# Altium PCB PCB1.PcbDoc
Units mm, origin at the board's own origin, x right, y up, seen from the top; angles counter-clockwise.
Board outline 27.8 x 26 mm, 2 copper layers (Top Layer, Bottom Layer), stack 0.88 mm thick; 34 components, 28 nets, 151 pads, 27 vias.
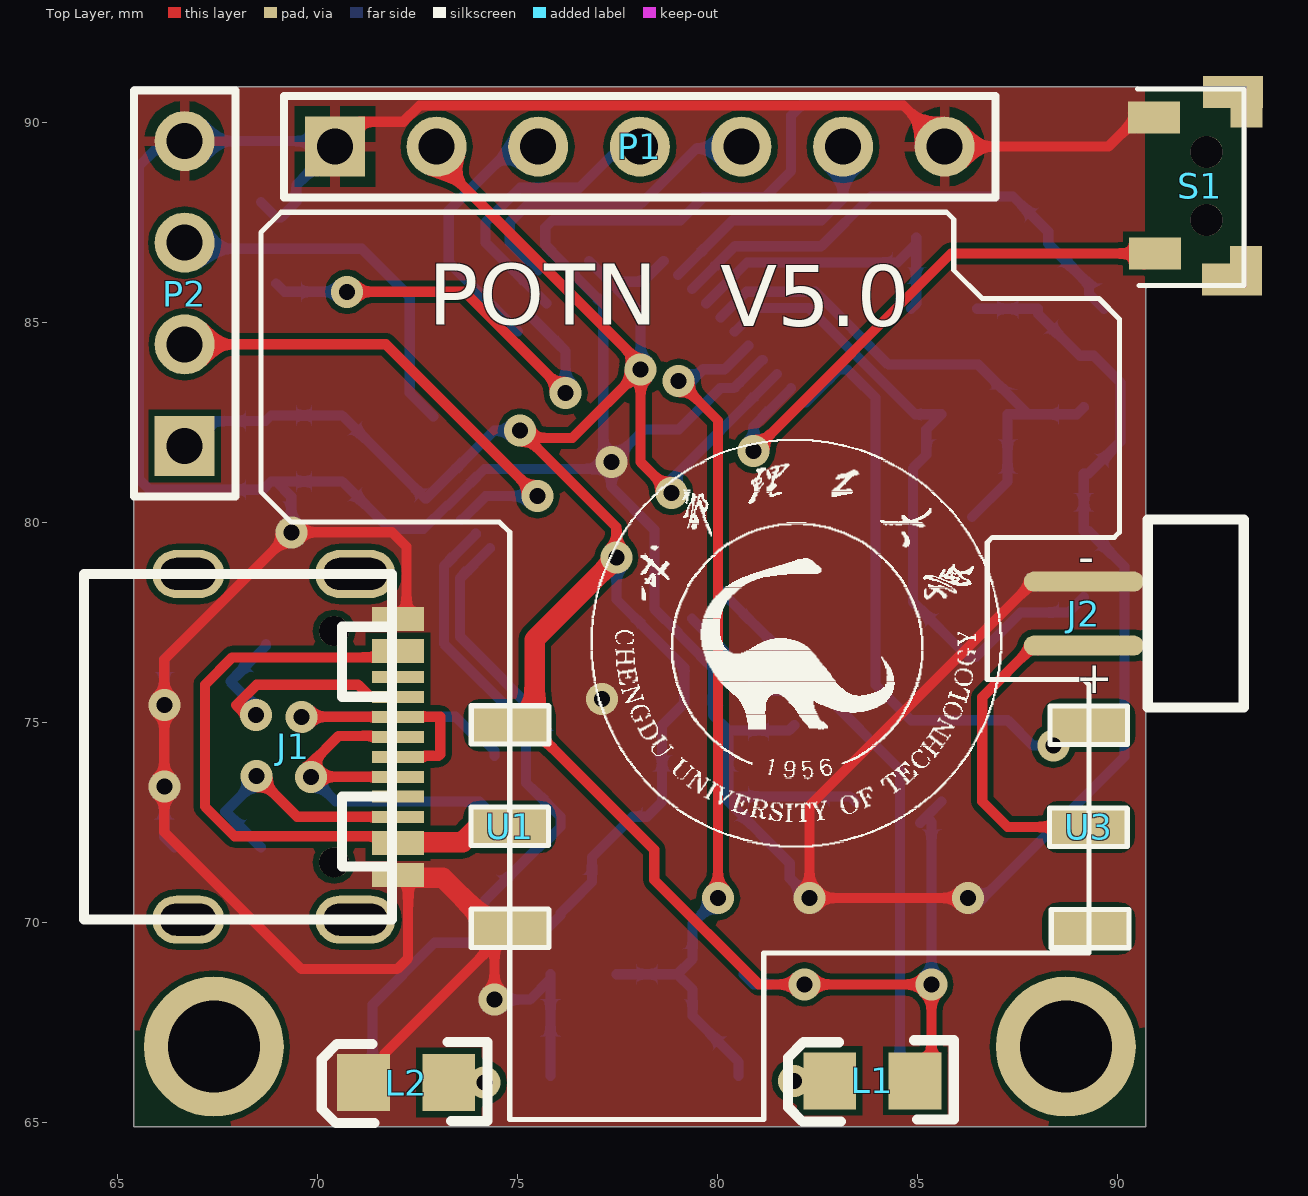
[diagram p0: Top Layer view]
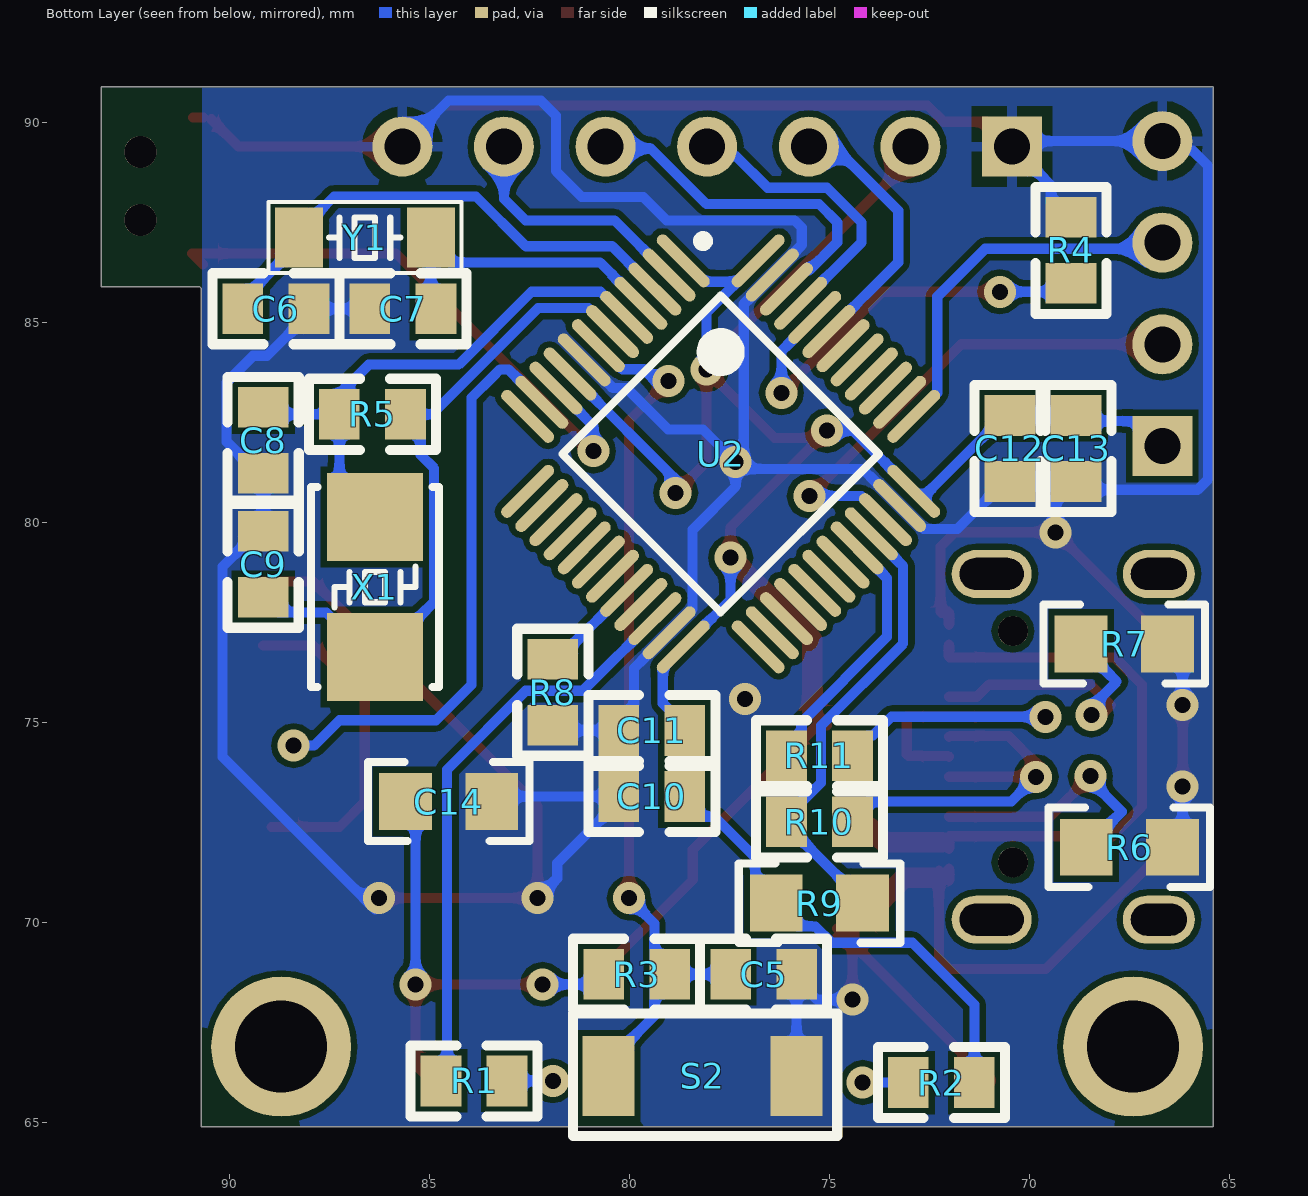
[diagram p1: Bottom Layer view, seen from below]
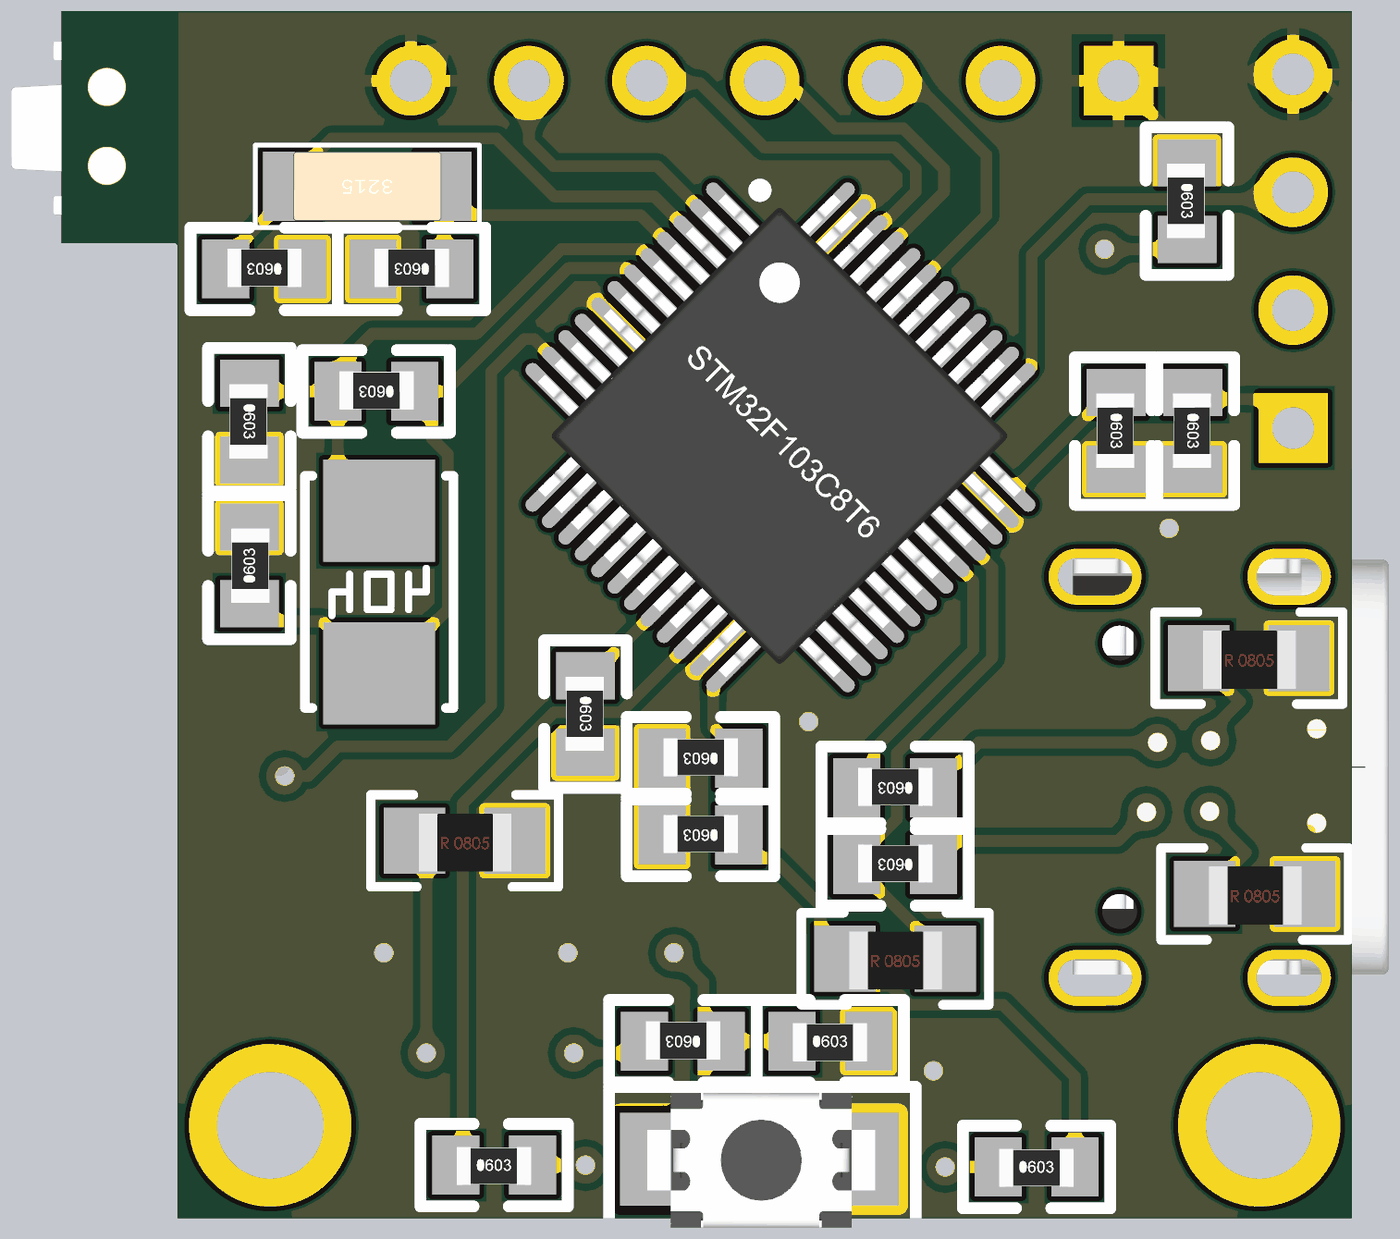
[diagram p2: 3D render of the assembled board from below, using the file's embedded part models]

## Layer stack, top to bottom
Top Solder: solder mask 0.0102, Solder Resist, Dk 3.5
Top Layer: signal copper 0.09
Dielectric 1: dielectric 0.7, FR-4, Dk 4.8
Bottom Layer: signal copper 0.09
Bottom Solder: solder mask 0.0102, Solder Resist, Dk 3.5

## Board outline
65.405,64.897 65.405,90.897 93.205,90.897 93.205,85.897 90.748,85.897 90.705,85.854 90.705,64.897

## Design rules (kind name [scope] priority, off if disabled: settings)
Clearance [All] p1: gap=0.152 ignorepadtopadclearanceinfootprint=TRUE
PolygonConnect [All] p1: thpad.connectstyle=Relief thpad.reliefconductorwidth=0.254 thpad.reliefentries=4 thpad.polygonreliefangle="90 Angle" thpad.airgapwidth=0.254 smdpad.connectstyle=Direct smdpad.reliefconductorwidth=0.254 smdpad.reliefentries=4 smdpad.polygonreliefangle="90 Angle" smdpad.airgapwidth=0.254 via.connectstyle=Direct via.reliefconductorwidth=0.254 via.reliefentries=4 via.polygonreliefangle="90 Angle" via.airgapwidth=0.254
RoutingVias [All] p1: holewidth=0.711 width=1.27 viastyle="Through Hole" minholewidth=0.3 minwidth=0.6 maxholewidth=0.711 maxwidth=1.27
SolderMaskExpansion [All] p1: expansion=0.102
Width [All] p1: maxlimit=0.254 minlimit=0.254 preferedwidth=0.254
30 further rules are at their usual default settings.

## Components (designator, comment, footprint, x,y, rotation, side; value= is the part's Value field where it differs from the comment)
C5 "104" RC0603 77.47,68.707 r180 bottom
C6 "15P" RC0603 88.011,85.344 r0 bottom
C7 "15P" RC0603 84.836,85.344 r0 bottom
C8 "22P" RC0603 89.154,82.88 r270 bottom
C9 "22P" RC0603 89.154,78.133 r90 bottom
C10 "104" RC0603 78.613,73.152 r0 bottom
C11 "104" RC0603 78.613,74.803 r0 bottom
C12 "104" RC0603 70.485,82.677 r270 bottom
C13 "104" RC0603 68.834,82.677 r270 bottom
C14 "106" RC0805 85.598,73.025 r180 bottom
J1 "TYPE-C-31-M-12" USB-TYPE-C_16PIN-MALE-TYPE-C-31-M-12 69.386,74.394 r270 top
J2 "MIC" MIC4.5*2.2MMTIE 89.154,77.724 r0 top
L1 "1" LED0805 84.938,66.04 r0 top
L2 "1" LED0805 73.279,66 r0 top
P1 "Header 7" HDR1X7 70.435,89.397 r0 top
P2 "Header 4" HDR1X4 66.675,81.915 r90 top
R1 "510" RC0603 84.709,66.04 r180 bottom
R2 "510" RC0603 73.025,66 r180 bottom
R3 "10K" RC0603 78.994,68.707 r0 bottom
R4 "10K" RC0603 68.961,87.63 r270 bottom
R5 "1M" RC0603 85.598,82.705 r0 bottom
R6 "5.1K" RC0805 68.58,71.882 r180 bottom
R7 "5.1K" RC0805 68.707,76.962 r180 bottom
R8 "10K" RC0603 81.915,76.581 r270 bottom
R9 "1.5K" RC0805 76.327,70.485 r180 bottom
R10 "22R" RC0603 74.422,72.517 r0 bottom
R11 "22R" RC0603 74.422,74.168 r0 bottom
S1 "switch_wo" SW-SMD-4X2X2侧 92.23,88.37 r270 top
S2 "SW-PB" SMT-KEY 80.52,66.167 r270 bottom
U1 "BOARD1" BOARD1DAN 74.813,71.36 r0 top
U2 "STM32F103C8T6" LQFP48 78.654,86.542 r315 bottom
U3 "BOARD2" BOARD2-DAN 78.031,71.31 r0 top
X1 "8M" "OSC 5032-2P" 86.36,78.387 r270 bottom
Y1 "32.768K" "OSC 3215-2P" 86.614,87.122 r0 bottom

## Footprints (in the part's own frame and the unit in brackets; to place one, negate y for a bottom-side part, rotate by r counter-clockwise, add the part's x,y. Pads: shape width x height; smd on the part's side, far side on the other; paste and mask are expansions set on the pad)
BOARD1DAN [mm]
  rrect50% 2x1 smd: 1(-0.01,3.57) 2(-0.01,1.03) 3(-0.01,-1.51)
BOARD2-DAN [mm]
  rrect50% 2x1 smd: 4(11.25,-1.46) 5(11.25,1.08) 6(11.25,3.62)
HDR1X4 [mm] "Connector; Header; 4 Position"
  rect 1.5x1.5 hole 0.9: 1(0,0)
  round 1.5 hole 0.9: 2(2.54,0) 3(5.08,0) 4(7.62,0)
  silkscreen extent -1.27,-1.27 8.89,1.27
HDR1X7 [mm] "Connector; Header; 7 Position"
  rect 1.5x1.5 hole 0.9: 1(0,0)
  round 1.5 hole 0.9: 2(2.54,0) 3(5.08,0) 4(7.62,0) 5(10.16,0) 6(12.7,0) 7(15.24,0)
  silkscreen extent -1.27,-1.27 16.51,1.27
LED0805 [mil]
  rect 52x56 smd: 1(0,0) 2(-84,0)
  Top Layer lines w20: -86,2 -84,0
  silkscreen extent -125,-40 38,40, body extent -81,-25 -1,24, height 43
LQFP48 [mm]
  oval 0.3x1.75 smd: 1(0,0) 2(0.5,0) 3(1,0) 4(1.5,0) 5(2,0) 6(2.5,0) 7(3,0) 8(3.5,0) 9(4,0) 10(4.5,0) 11(5,0) 12(5.5,0) 25(5.5,8.15) 26(5,8.15) 27(4.5,8.15) 28(4,8.15) 29(3.5,8.15) 30(3,8.15) 31(2.5,8.15) 32(2,8.15) 33(1.5,8.15) 34(1,8.15) 35(0.5,8.15) 36(0,8.15)
  oval 1.75x0.3 smd: 13(6.825,1.325) 14(6.825,1.825) 15(6.825,2.325) 16(6.825,2.825) 17(6.825,3.325) 18(6.825,3.825) 19(6.825,4.325) 20(6.825,4.825) 21(6.825,5.325) 22(6.825,5.825) 23(6.825,6.325) 24(6.825,6.825) 37(-1.325,6.825) 38(-1.325,6.325) 39(-1.325,5.825) 40(-1.325,5.325) 41(-1.325,4.825) 42(-1.325,4.325) 43(-1.325,3.825) 44(-1.325,3.325) 45(-1.325,2.825) 46(-1.325,2.325) 47(-1.325,1.825) 48(-1.325,1.325)
  silkscreen extent -0.82,-0.12 5.55,6.88, body extent -1.76,-0.46 7.24,8.54, height 6.78
MIC4.5*2.2MMTIE [mm]
  oval 3x0.5 smd: 1(0,-0.8) 2(0,0.8)
  silkscreen extent 1.6,-2.35 4,2.35, body extent 1.53,-2.42 3.93,2.38, height 3.3
"OSC 3215-2P" [mm] "3.2*1.5*0.6mm(长宽高)"
  rect 1.2x1.5 smd: 1(1.65,0) 2(-1.65,0)
  silkscreen extent -2.41,-0.89 2.41,0.89, body extent -1.6,-0.75 1.6,0.75, height 0.61
"OSC 5032-2P" [mm] "5mm*3.2mm*0.8mm(长*宽*高)"
  rect 2.2x2.4 smd: 1(-1.75,0) 2(1.75,0)
  silkscreen extent -2.5,-1.6 2.5,1.6, body extent -2.5,-1.6 2.5,1.6, height 1.56
RC0603 [mil]
  rect 40x50 smd: 1(0,0) 2(65,0)
  silkscreen extent -30,-35 95,35, body extent 1,-17 64,15, height 18
RC0805 [mil]
  rect 52x56 smd: 1(0,0) 2(85,0)
  silkscreen extent -37,-39 122,39, body extent 4,-26 82,23, height 16
SMT-KEY [mm]
  rect 2x1.3 smd paste+0 mask+0.2: 1(0,0) 2(0,4.7)
  silkscreen extent -1.56,-0.89 1.5,5.72, body extent -1.43,-0.06 1.47,4.84, height 2
SW-SMD-4X2X2侧 [mm] "TS-018/TS-A002 /THAM04"
  rect 0.8x1.3 smd mask+0: 1(1.646,-1.301) 2(-1.758,-1.327)
  rect 0.8x0.8 smd mask+0: 3(1.862,0.985) 4(-1.91,0.997)
  rect 0.8x1.5 smd mask+0: 3(2.293,0.629) 4(-2.393,0.654)
  round 0.8 hole 0.8 mask+0: 7(-0.893,-0.006) 8(0.807,-0.006)
  silkscreen extent -2.47,-1.73 2.44,0.93, body extent -2.38,-1.75 2.37,2.05, height 1.8
USB-TYPE-C_16PIN-MALE-TYPE-C-31-M-12 [mm]
  oval 1.2x2 hole 0.8 slot 1.6 at 90 deg: 0(-4.32,1.556) 0(4.32,1.556)
  oval 1.2x1.8 hole 0.8 slot 1.4 at 90 deg: 0(-4.32,-2.624) 0(4.32,-2.624)
  rect 0.3x1.3 smd: A1(-3.35,2.623) A4(-2.55,2.623) A5(-1.25,2.623) A6(-0.25,2.623) A7(0.25,2.623) A8(1.25,2.624) A9(2.55,2.623) A12(3.35,2.623) B1(3.05,2.623) B4(2.25,2.623) B5(1.75,2.623) B6(0.75,2.623) B7(-0.75,2.623) B8(-1.75,2.624) B9(-2.25,2.623) B12(-3.05,2.623)
  round 0.75 hole 0.75 unplated: ""(-2.89,1.026) ""(2.89,1.026)
  silkscreen extent -4.32,-5.23 4.32,2.47, body extent -4.69,-4.77 4.25,2.13, height 3.28

## Part data
C5 C6 C7 C8 C9 C10 C11 C12 C13 C14: library part Cap, "Capacitor", LatestRevisionDate=17-Jul-2002, LatestRevisionNote="Re-released for DXP Platform.", PackageDescription="Radial Cap, Thru-Hole; 2 Leads; 0.3 in Pin Spacing", PackageReference=RAD-0.3, Published=8-Jun-2000, Publisher="Altium Limited"
J2: "咪头"
L1 L2: library part LED
P1: "Header, 7-Pin", LatestRevisionDate=17-Jul-2002, LatestRevisionNote="Re-released for DXP Platform.", Publisher="Altium Limited"
P2: "Header, 4-Pin", LatestRevisionDate=17-Jul-2002, LatestRevisionNote="Re-released for DXP Platform.", Publisher="Altium Limited"
R1 R2 R3 R4 R5 R6 R7 R8 R9 R10 R11: library part Res2, "Resistor", LatestRevisionDate=17-Jul-2002, LatestRevisionNote="Re-released for DXP Platform.", PackageDescription="Axial Device, Thru-Hole; 2 Leads; 0.4 in Pin Spacing", PackageReference=AXIAL-0.4, Published=8-Jun-2000, Publisher="Altium Limited"
S1: "卧式开关"
S2: "Switch", LatestRevisionDate=17-Jul-2002, LatestRevisionNote="Re-released for DXP Platform.", PackageDescription="Switch; 2 Leads", PackageReference=SPST-2, Published=24-Mar-1999, Publisher="Altium Limited"
U2: "STM32"
X1 Y1: library part Y1, "晶振"

## Free pads (board coordinates)
  round 3.5 hole 2.3: 50(67.405,66.897) 51(88.705,66.897)

## Via types
v1: diameter 0.8, hole 0.4, Top Layer to Bottom Layer, tented both sides, 27 vias

## Nets (pads, with @x,y where several pads share a name; then routed paths per layer and width w, separated by ;. In a path a pad name is that pad's centre, name@x,y a point inside that pad or via, vN(x,y) a via of type N, cw(c..) or ccw(c..) an arc to the next point about the centre after c; other vN are vias at no path point)
3V3: C10.1 C11.1 C12.1 C13.1 C14.1 L1.1 P1.2 P2.1 R2.2 R3.2 R9.1 U1.1 U2.1 U2.9 U2.24 U2.36 U2.48 | length 84.7
  Top Layer w0.254: P2.1 P2.1@66.776,82.016 ; P1.2 72.975,89.068 78.075,83.968 v1(78.075,83.82) ; v1(75.057,82.296) v1@75.241,82.112 ; U1.1@75.426,75.294 75.062,74.93 75.303,74.93 78.415,71.818 78.415,71.064 81.026,68.453 v1(82.169,68.453) v1(85.344,68.453) 85.344,66.446 L1.1 ; v1(77.47,79.121) 77.47,79.883 v1@75.241,82.112 ; v1(78.844,80.741) 78.836,80.741 78.836,80.749 78.075,81.509 v1(78.075,83.82) ; v1@75.241,82.112 76.367,82.112 v1(78.075,83.82)
  Top Layer w0.508: U1.1@75.426,75.294 75.426,77.077 v1(77.47,79.121)
  Bottom Layer w0.254: P2.1 67.298,82.538 68.695,82.538 C13.1 C12.1 70.612,82.677 72.685,80.604 72.716,80.604 U2.36 74.408,82.296 v1(75.057,82.296) ; R2.2 71.374,67.945 72.923,69.494 74.944,69.494 75.351,69.901 75.794,69.901 76.073,70.18 76.073,70.231 R9.1 76.86,71.018 76.86,71.633 77.872,72.644 78.232,72.644 78.613,73.025 C10.1 C11.1 78.613,74.93 79.167,75.484 79.167,76.377 U2.24 77.47,78.074 v1(77.47,79.121) ; U2.48 U2.48@77.302,86.02 ; v1(78.075,83.82) 78.075,85.247 U2.48@77.302,86.02 ; U2.1 78.132,86.02 77.722,86.02 U2.48@77.302,86.02 ; v1(78.844,80.741) 78.677,80.908 U2.9 ; R3.2 80.899,68.453 v1(82.169,68.453) ; C14.1@85.065,72.492 C14.1@85.217,72.644 ; v1(85.344,68.453) 85.344,72.517 C14.1@85.217,72.644 ; C14.1 C14.1@85.217,72.644
5V: J1.A4 J1.A9 J1.B4 J1.B9 U1.2 | length 16.9
  Top Layer w0.254: J1.A4 J1.B9 71.995,76.63 67.867,76.63 67.183,75.946 67.183,72.898 67.923,72.158 71.995,72.158 J1.B4 J1.A9 J1.B4@72.174,72.009 ; U1.2@74.006,72.39 U1.2
  Top Layer w0.508: J1.B4@72.174,72.009 73.625,72.009 U1.2@74.006,72.39
BOOT0: R4.2 U2.44 | length 10.6
  Top Layer w0.254: v1(70.739,85.769) 73.672,85.769 v1(76.2,83.241)
  Bottom Layer w0.254: R4.2 69.171,85.769 v1(70.739,85.769) ; U2.44 75.366,85.115 76.2,84.281 v1(76.2,83.241)
GND: C5.2 C6.1 C7.2 C8.2 C9.2 C10.2 C11.2 C12.2 C13.2 C14.2 J1.A1 J1.A12 J1.B1 J1.B12 J2.2 L2.2 P1.1 P1.7 P2.4 R4.1 R6.2 R7.2 R8.2 S1.2 S2.2 U1.3 U2.8 U2.23 U2.35 U2.47 | length 172.8
  Top Layer w0.254: P1.1 71.058,90.02 72.142,90.02 72.549,90.426 84.646,90.426 P1.7 89.767,89.397 S1.2@90.45,90.08 ; L2.2 71.679,66.534 71.679,66.726 74.37,69.417 U1.3@74.37,69.85 ; J1.B12 J1.A1 72.198,77.744 72.221,77.767 72.221,79.395 71.86,79.756 v1(69.347,79.756) 66.167,76.576 v1(66.167,75.438) 66.421,75.438 66.167,75.184 66.167,73.66 66.421,73.406 v1(66.167,73.406) 66.167,72.263 69.596,68.834 71.987,68.834 72.263,69.11 72.263,71.12 72.263,71.298 J1.A12 J1.B1 J1.B1@72.032,71.321 ; U1.3@74.006,70.242 74.006,70.214 U1.3@74.37,69.85 ; v1(74.422,68.072) 74.422,69.486 U1.3@74.786,69.85 ; U1.3@74.695,69.742 U1.3@74.803,69.633 ; U1.3 U1.3@74.786,69.85 ; v1(86.26,70.612) v1(82.296,70.612) 82.296,72.916 87.904,78.524 J2.2 ; S1.2@90.653,90.128 S1.2 ; U1.3@74.37,69.85 U1.3@74.786,69.85
  Top Layer w0.508: J1.A12@72.263,71.12 73.128,71.12 U1.3@74.006,70.242
  Bottom Layer w0.254: v1(66.167,73.406) 66.167,72.136 R6.2 ; v1(66.167,75.438) 66.167,76.581 R7.2 ; R4.1@68.58,88.011 R4.1 69.088,87.63 69.469,88.011 69.469,88.431 P1.1 70.297,89.535 P2.4 66.437,89.297 65.915,89.297 65.532,88.913 65.532,81.082 65.794,80.82 68.628,80.82 C13.2 C13.2@68.961,81.026 ; v1(69.347,79.756) 69.342,79.761 69.342,80.645 C13.2@68.961,81.026 ; v1(74.422,68.072) 75.311,68.072 75.819,68.58 C5.2 C5.2 S2.2 ; U2.8 81.116,84.067 80.409,83.36 80.063,83.36 79.027,82.324 78.158,82.324 v1(77.343,81.509) 77.343,81.366 77.343,80.899 78.419,79.823 78.419,77.844 79.007,77.256 79.007,77.231 79.883,76.355 79.883,75.184 C11.2 ; R8.2 81.788,74.803 C11.2 ; v1(82.296,70.612) 81.804,71.104 81.804,71.485 80.264,73.025 C10.2 ; C14.2 83.312,73.152 C10.2 ; P1.7 84.521,90.551 82.217,90.551 81.836,90.17 81.836,88.785 81.189,88.138 79.653,88.138 79.07,87.555 75.873,87.555 75.692,87.374 75.692,86.935 76.427,86.201 U2.47 76.427,86.176 77.14,85.463 77.14,81.34 74.171,81.34 73.257,80.425 U2.35 73.232,80.425 72.644,79.837 71.801,79.837 70.612,81.026 C12.2 C13.2@68.961,81.026 ; v1(86.26,70.612) 86.26,70.433 86.36,70.333 90.17,74.143 90.17,78.895 89.281,79.784 C9.2 C8.2 89.281,81.229 90.068,82.016 90.068,83.504 89.402,84.17 89.058,84.17 88.011,85.217 C6.1 C7.2 ; C10.2 C11.2
  other v1: 77.11,75.592
NetC6_2: C6.2 U2.3 Y1.1 | length 12.7
  Bottom Layer w0.254: U2.3 80.432,86.905 82.587,86.905 83.833,88.151 87.385,88.151 88.264,87.272 Y1.1 88.264,86.972 89.281,85.955 89.281,85.725 C6.2
NetC7_1: C7.1 U2.4 Y1.2 | length 7.7
  Bottom Layer w0.254: U2.4 80.732,86.499 84.491,86.499 Y1.2@84.964,86.972 ; C7.1 84.964,85.472 Y1.2@84.964,86.972 ; Y1.2 Y1.2@84.964,86.972
NetC8_1: C8.1 R5.2 U2.5 X1.1 | length 14.1
  Bottom Layer w0.254: U2.5 80.081,85.128 80.722,85.769 82.446,85.769 84.268,83.947 86.515,83.947 R5.2@87.757,82.705 ; X1.1 87.249,81.026 R5.2 R5.2@87.757,82.705 ; C8.1 88.979,82.705 R5.2@87.757,82.705
NetC9_1: C9.1 R5.1 U2.6 X1.2 | length 17
  Bottom Layer w0.254: U2.6 80.434,84.774 81.023,85.363 82.277,85.363 84.935,82.705 R5.1 85.217,82.324 85.217,81.689 84.881,81.353 84.881,78.016 86.26,76.637 X1.2 86.46,76.637 87.575,77.752 88.773,77.752 C9.1
NetJ1_A5: J1.A5 R7.1 | length 7.4
  Top Layer w0.254: v1(68.453,75.184) 68.22,75.184 67.966,75.438 68.474,75.946 71.013,75.946 71.315,75.644 J1.A5
  Bottom Layer w0.254: v1(68.453,75.184) 68.453,75.387 67.818,76.022 68.707,76.911 R7.1
NetJ1_B5: J1.B5 R6.1 | length 6.4
  Top Layer w0.254: v1(68.474,73.66) 69.49,72.644 J1.B5
  Bottom Layer w0.254: v1(68.474,73.66) 68.474,73.554 67.691,72.771 R6.1
NetJ2_1: J2.1 U3.5 | length 8.3
  Top Layer w0.254: U3.5@88.946,72.39 87.249,72.39 86.614,73.025 86.614,75.634 87.904,76.924 J2.1
NetL1_2: L1.2 R1.2 | length 1.1
  Bottom Layer w0.254: v1(81.915,66.04) R1.2
NetL2_1: L2.1 R2.1 | length 1.1
  Bottom Layer w0.254: R2.1 v1(74.168,66)
NetR8_1: R8.1 U2.20 | length 2.6
  Bottom Layer w0.254: U2.20@80.081,78.304 U2.20 80.068,78.301 81.788,76.581 R8.1
NRST: C5.1 R3.1 S2.1 U2.7 | length 22.4
  Top Layer w0.254: v1(79.027,83.538) 79.027,83.533 80.01,82.55 v1(80.01,70.612)
  Bottom Layer w0.254: C5.1 R3.1 ; v1@79.167,83.439 79.246,83.439 79.639,83.832 80.174,83.832 80.763,84.421 U2.7 ; v1(80.01,70.612) 79.375,69.977 79.375,69.088 R3.1 ; S2.1 80.52,66.517 79.375,67.662 79.375,68.326 R3.1
PA0: S1.1 U2.10 | length 14.4
  Top Layer w0.254: v1(80.899,81.788) 85.835,86.724 S1.1 S1.1@90.656,86.451
  Bottom Layer w0.254: v1(80.899,81.788) 80.899,82.411 81.836,83.347 U2.10
PA1: U2.11 U3.6 | length 14.6
  Bottom Layer w0.254: U2.11 82.202,83.006 83.025,83.83 83.236,83.83 83.406,83.66 83.947,83.118 83.947,75.946 84.836,75.057 87.249,75.057 87.884,74.422 v1(88.392,74.422)
PB7: P1.3 U2.43 | length 6.6
  Bottom Layer w0.254: U2.43 73.279,86.507 73.279,87.797 74.879,89.397 P1.3
PB8: P1.4 U2.45 | length 7.3
  Bottom Layer w0.254: U2.45 74.193,87.007 74.193,87.501 75.06,88.368 76.544,88.368 77.335,89.159 77.817,89.159 P1.4
PB9: P1.5 U2.46 | length 8.1
  Bottom Layer w0.254: U2.46@75.506,86.301 74.803,87.005 74.803,87.503 75.261,87.961 78.075,87.961 79.464,89.35 80.548,89.35 P1.5
PB11: R1.1 U2.22 | length 14.6
  Bottom Layer w0.254: U2.22 81.164,75.794 82.59,75.794 84.557,73.827 84.557,66.192 R1.1
PC13: P1.6 U2.2 | length 6.2
  Bottom Layer w0.254: U2.2 80.374,87.555 82.597,87.555 83.135,88.093 P1.6
SWCLK: P2.3 U2.37 | length 9.4
  Bottom Layer w0.254: P2.3 66.827,86.843 71.106,86.843 72.302,85.647 72.302,83.241 U2.37
SWDIO: P2.2 U2.34 | length 13.2
  Top Layer w0.254: P2.2 71.704,84.455 v1(75.499,80.66)
  Bottom Layer w0.254: P2.2@66.437,84.217 P2.2 P2.2@67.012,84.455 ; U2.34@73.586,80.072 U2.34 73.611,80.072 74.199,80.66 v1(75.499,80.66)
TPYC3_DN: J1.A7 J1.B7 R11.1 | length 10.8
  Top Layer w0.254: v1(69.596,75.144) J1.B7 73.065,75.144 73.065,74.208 73.024,74.167 72.032,74.167 J1.A7
  Bottom Layer w0.254: v1(69.596,75.144) 73.446,75.144 73.914,74.676 74.041,74.676 74.422,74.295 R11.1
TPYC3_DP: J1.A6 J1.B6 R10.1 | length 10.1
  Top Layer w0.254: J1.B6 v1(69.834,73.644) 69.834,73.971 70.53,74.667 71.986,74.667 J1.A6
  Bottom Layer w0.254: v1(69.834,73.644) 70.453,73.025 74.041,73.025 74.422,72.644 R10.1
USBDM: R11.2 U2.32 | length 6.5
  Bottom Layer w0.254: U2.32 74.305,79.352 73.562,78.609 73.562,77.141 75.692,75.011 75.692,74.549 R11.2
USBDP: R9.2 R10.2 U2.33 | length 11.6
  Bottom Layer w0.254: U2.33 73.952,79.706 73.156,78.91 73.156,76.972 75.209,74.919 75.209,73.493 75.449,73.254 75.463,73.254 76.073,72.644 R10.2 76.073,72.39 75.692,72.009 75.641,72.009 74.168,70.536 R9.2
pads on no net: J1. J1.0 J1.A8 J1.B8 S1.3 S1.4 S1.7 S1.8 U2.12 U2.13 U2.14 U2.15 U2.16 U2.17 U2.18 U2.19 U2.21 U2.25 U2.26 U2.27 U2.28 U2.29 U2.30 U2.31 U2.38 U2.39 U2.40 U2.41 U2.42 U3.4

## Polygon pours and split planes (outlines as drawn)
GND on Top Layer "GND_L01_P000" (solid, remove dead copper, pour order 0): 65.41,64.91 90.68,64.91 90.69,64.92 90.68,64.93 90.68,90.88 65.41,90.88
GND on Bottom Layer "GND_L02_P002" (solid, remove dead copper, pour order 2): 65.42,64.92 90.68,64.92 90.68,90.87 65.42,90.87

## Silkscreen, mask and mechanical layers (free items; w line width, h text height)
Top Overlay:
  drawing of 3088 lines, arcs and shapes, not listed
  text "POTN" at 72.76,84.94 h1.52
  text "V5.0" at 80.07,84.91 h1.52
Mechanical 1:
  lines w0.127: 65.405,64.897 90.705,64.897 90.705,85.854 90.748,85.897 93.205,85.897 93.205,90.897 90.705,90.897 65.405,90.897 65.405,64.897

## Text inside footprints (layer, text, board x,y; h text height)
J2: Top Overlay "-" at 89.014,78.744 h0.81; Top Overlay "+" at 88.954,75.734 h0.81